# Altium PCB PCB1.PcbDoc
Units mm, origin at the board's own origin, x right, y up, seen from the top; angles counter-clockwise.
Board outline 32 x 41 mm, 2 copper layers (Top Layer, Bottom Layer); 2 components, 20 nets, 46 pads, 0 vias.
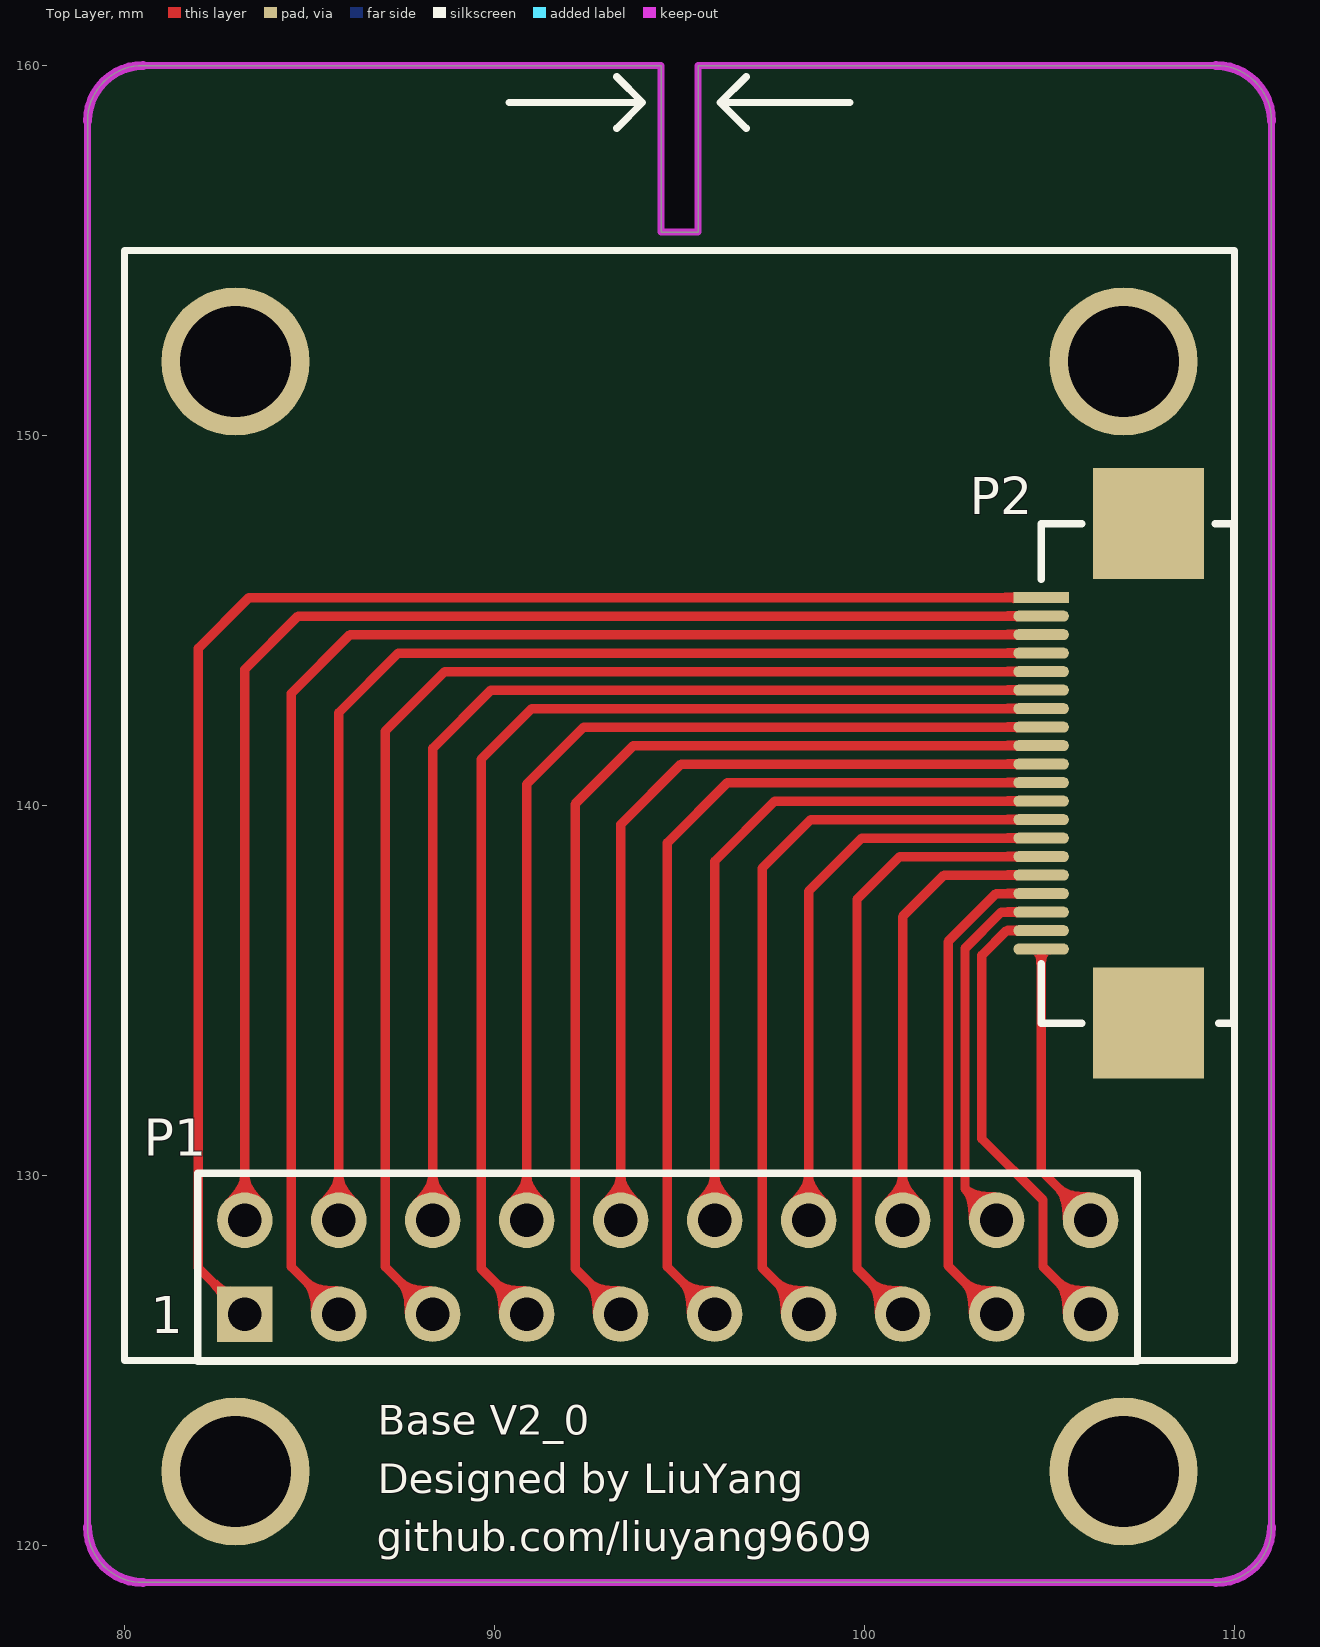
[diagram p0: Top Layer view]
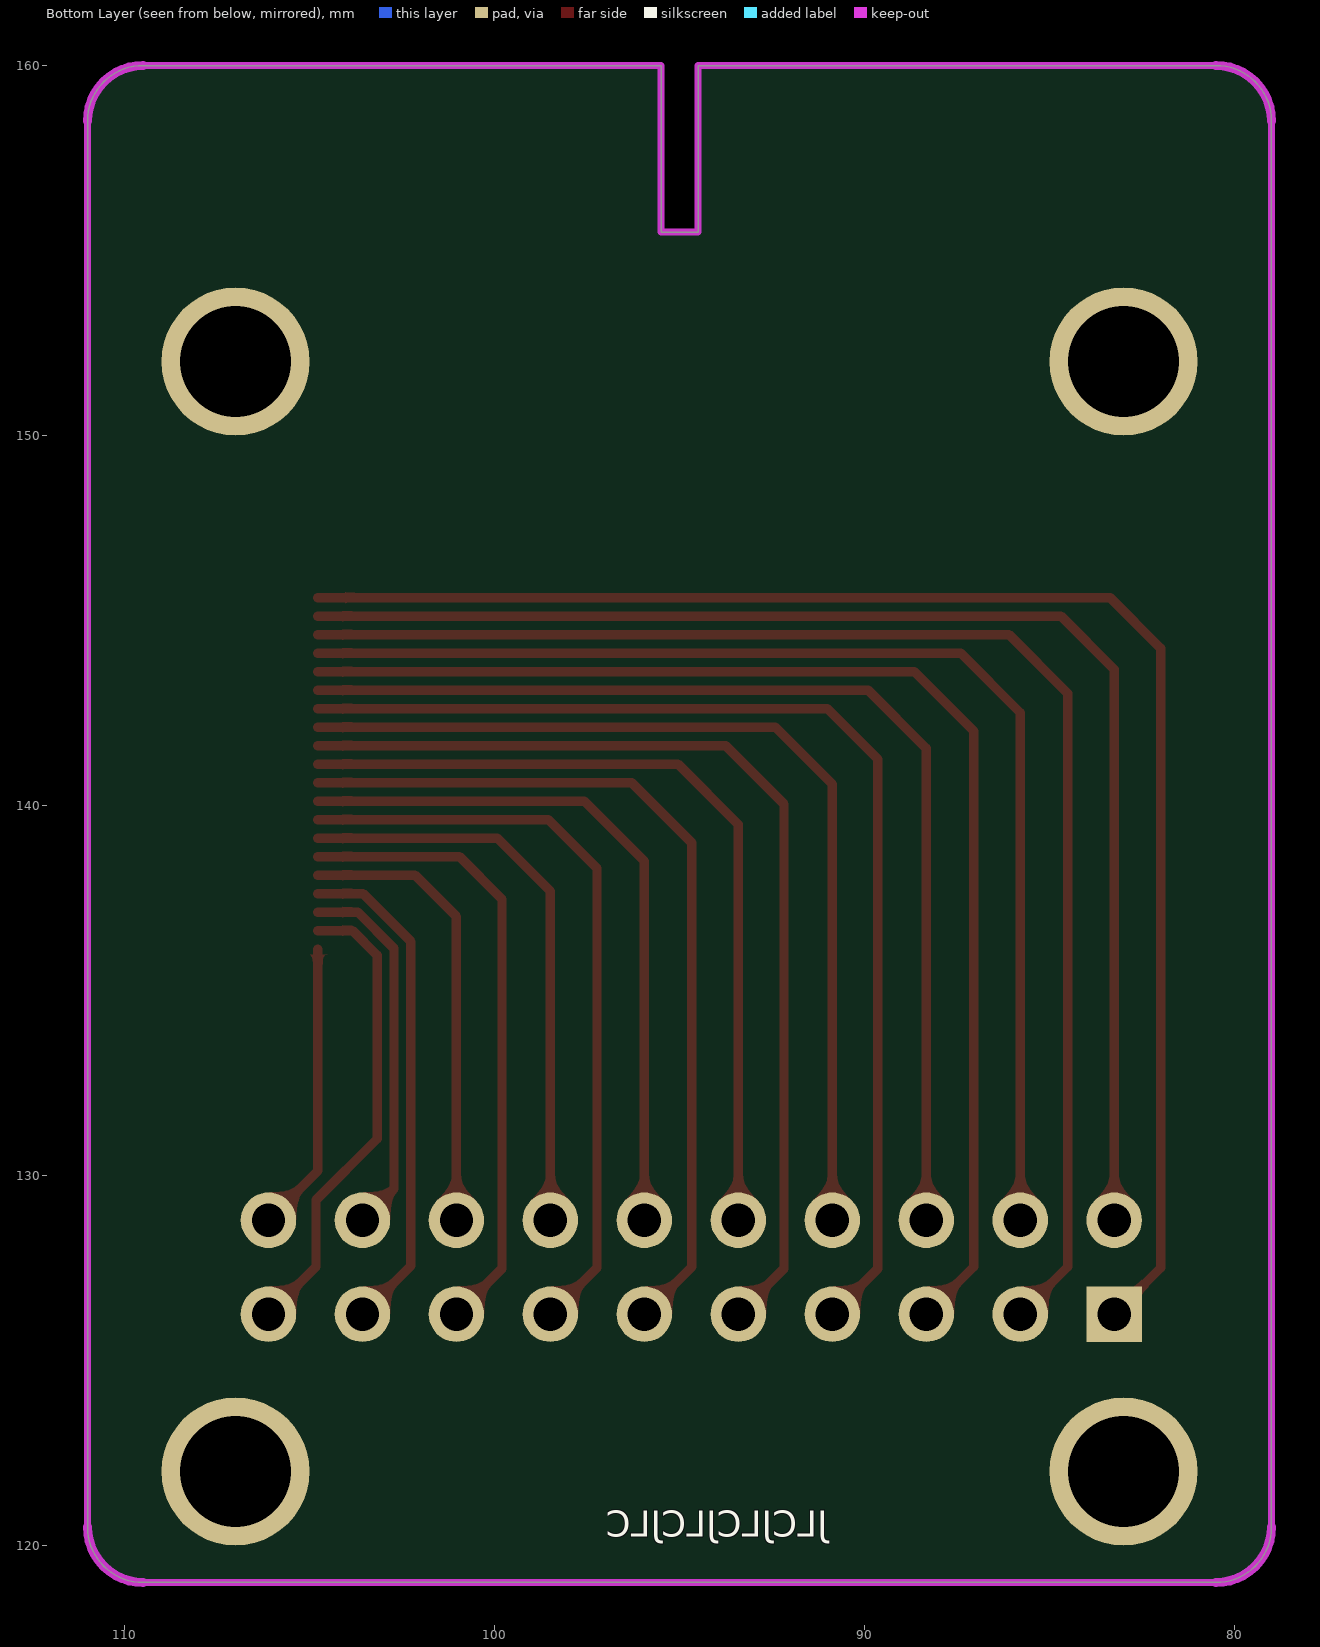
[diagram p1: Bottom Layer view, seen from below]

## Layer stack, top to bottom
Top Solder: solder mask 0.0102, Solder Resist, Dk 3.5
Top Layer: signal copper 0.0356
Dielectric 1: dielectric 0.32, FR-4, Dk 4.8
Bottom Layer: signal copper 0.0356
Bottom Solder: solder mask 0.0102, Solder Resist, Dk 3.5

## Board outline
79,120.5 79,158.5 cw(c80.5,158.5) 80.5,160 94.5,160 94.5,155.5 95.5,155.5 95.5,160 109.5,160 cw(c109.5,158.5) 111,158.5 111,120.5 cw(c109.5,120.5) 109.5,119 80.5,119 cw(c80.5,120.5)

## Design rules (kind name [scope] priority, off if disabled: settings)
Clearance [All] p1: gap=0.2
PolygonConnect [All] p1: connectstyle=Relief reliefconductorwidth=0.254 reliefentries=4 polygonreliefangle="90 Angle" airgapwidth=0.254
RoutingVias [All] p1: holewidth=0.3 width=0.6 viastyle="Through Hole" minholewidth=0.3 minwidth=0.6 maxholewidth=3 maxwidth=6
SolderMaskExpansion [All] p1: expansion=0.102
Width [All] p1: maxlimit=0.508 minlimit=0.2 preferedwidth=0.254
30 further rules are at their usual default settings.

## Classes and differential pairs
component class Sheet1: P1

## Components (designator, comment, footprint, x,y, rotation, side; value= is the part's Value field where it differs from the comment)
P1 "Header 10X2" HDR2X10 83.25,126.25 r0 top
P2 "Header 22" FPC20Pin 104.775,145.618 r0 top (schematic designator P3)

## Footprints (in the part's own frame and the unit in brackets; to place one, negate y for a bottom-side part, rotate by r counter-clockwise, add the part's x,y. Pads: shape width x height; smd on the part's side, far side on the other; paste and mask are expansions set on the pad)
FPC20Pin [mm]
  rect 1.5x0.3 smd: 1(0,0)
  oval 1.5x0.3 smd: 2(0,-0.5) 3(0,-1) 4(0,-1.5) 5(0,-2) 6(0,-2.5) 7(0,-3) 8(0,-3.5) 9(0,-4) 10(0,-4.5) 11(0,-5) 12(0,-5.5) 13(0,-6) 14(0,-6.5) 15(0,-7) 16(0,-7.5) 17(0,-8) 18(0,-8.5) 19(0,-9) 20(0,-9.5)
  rect 3x3 smd: 21(2.9,2) 22(2.9,-11.5)
  silkscreen extent 0,-11.5 5.2,2
HDR2X10 [mm] "Connector; Header; 10x2 Position"
  rect 1.5x1.5 hole 0.9: 1(0,0)
  round 1.5 hole 0.9: 2(0,2.54) 3(2.54,0) 4(2.54,2.54) 5(5.08,0) 6(5.08,2.54) 7(7.62,0) 8(7.62,2.54) 9(10.16,0) 10(10.16,2.54) 11(12.7,0) 12(12.7,2.54) 13(15.24,0) 14(15.24,2.54) 15(17.78,0) 16(17.78,2.54) 17(20.32,0) 18(20.32,2.54) 19(22.86,0) 20(22.86,2.54)
  silkscreen extent -1.27,-1.27 24.13,3.81

## Part data
P1: "Header, 10-Pin, Dual row"
P2: "Header, 22-Pin"

## Free pads (board coordinates)
  round 4 hole 3: 0(83,152) 1(107,152) 2(107,122) 3(83,122)

## Nets (pads, with @x,y where several pads share a name; then routed paths per layer and width w, separated by ;. In a path a pad name is that pad's centre, name@x,y a point inside that pad or via, vN(x,y) a via of type N, cw(c..) or ccw(c..) an arc to the next point about the centre after c; other vN are vias at no path point)
D1: P1.3 P2.3 | length 38.2
  Top Layer w0.254: P1.3 84.506,127.534 84.506,143.027 86.097,144.618 P2.3
D2: P1.4 P2.4 | length 33.4
  Top Layer w0.254: P1.4 85.79,142.508 87.4,144.118 P2.4
D3: P1.5 P2.5 | length 34.7
  Top Layer w0.254: P1.5 87.046,127.534 87.046,142.011 88.653,143.618 P2.5
D4: P1.6 P2.6 | length 29.9
  Top Layer w0.254: P1.6 88.33,141.543 89.905,143.118 P2.6
D5: P1.7 P2.7 | length 31.2
  Top Layer w0.254: P1.7 89.637,127.483 89.637,141.249 91.005,142.618 P2.7
D6: P1.8 P2.8 | length 26.3
  Top Layer w0.254: P1.8 90.87,140.578 92.41,142.118 P2.8
D7: P1.9 P2.9 | length 27.6
  Top Layer w0.254: P1.9 92.177,127.483 92.177,140.039 93.756,141.618 P2.9
D8: P1.10 P2.10 | length 22.7
  Top Layer w0.254: P1.10 93.41,139.486 95.043,141.118 P2.10
D9: P1.11 P2.11 | length 24.1
  Top Layer w0.254: P1.11 94.666,127.534 94.666,138.989 96.295,140.618 P2.11
D10: P1.12 P2.12 | length 19.2
  Top Layer w0.254: P1.12 95.95,138.495 97.573,140.118 P2.12
D11: P1.13 P2.13 | length 20.7
  Top Layer w0.254: P1.13 97.231,127.509 97.231,138.303 98.546,139.618 P2.13
D12: P1.14 P2.14 | length 15.8
  Top Layer w0.254: P1.14 98.49,137.682 99.926,139.118 P2.14
D13: P1.15 P2.15 | length 17.2
  Top Layer w0.254: P1.15 99.797,127.483 99.797,137.465 100.95,138.618 P2.15
D14: P1.16 P2.16 | length 12.4
  Top Layer w0.254: P1.16 101.03,136.996 102.152,138.118 P2.16
D15: P1.17 P2.17 | length 13.7
  Top Layer w0.254: P1.17 102.26,127.56 102.26,136.322 103.557,137.618 P2.17
D16: P1.18 P2.18 | length 10.2
  Top Layer w0.254: P1.18 102.718,129.642 102.718,136.137 103.699,137.118 P2.18
D17: P1.19 P2.19 | length 12.8
  Top Layer w0.254: P2.19 103.841,136.618 103.172,135.949 103.172,130.991 104.826,129.337 104.826,127.534 P1.19
D18: P1.20 P2.20 | length 7.9
  Top Layer w0.254: P2.20 104.775,130.125 P1.20
GND: P1.2 P2.2 | length 37
  Top Layer w0.254: P1.2 83.25,143.677 84.692,145.118 P2.2
VCC: P1.1 P2.1 | length 41.9
  Top Layer w0.254: P1.1 81.991,127.509 81.991,144.247 83.363,145.618 P2.1
pads on no net: P2.21 P2.22

## Keep-outs
Keep-Out Layer:
  lines w0.2: 79,120.5 79,124 79,156 79,158.5 ; 80.5,119 109.5,119 ; 80.5,160 87,160 94.5,160 94.5,155.5 95.5,155.5 95.5,160 103,160 109.5,160 ; 111,120.5 111,124 111,156 111,158.5
  lines w0.254: 79,120.5 ccw(c80.5,120.5) 80.5,119 ; 79,158.5 cw(c80.5,158.5) 80.5,160 ; 109.5,119 ccw(c109.5,120.5) 111,120.5 ; 109.5,160 cw(c109.5,158.5) 111,158.5

## Silkscreen, mask and mechanical layers (free items; w line width, h text height)
Top Overlay:
  lines w0.2: 90.4,159 94,159 ; 93.3,158.3 94,159 ; 93.3,159.7 94,159 ; 96.8,158.3 96.1,159 ; 96.8,159.7 96.1,159 ; 99.6,159 96.1,159 ; 94,159 94,159 ; 96.1,159 96.1,159 ; 96.1,159 96.1,159 ; 80,125 80,155 110,155 110,125 80,125
  text "Base V2_0" at 86.843,122.987 h0.8
  text "Designed by LiuYang" at 86.843,121.412 h0.8
  text "github.com/liuyang9609" at 86.817,119.837 h0.8
Bottom Overlay:
  text "JLCJLCJLCJLC" at 91,120 h1.2

## Text inside footprints (layer, text, board x,y; h text height)
P1: Top Overlay "1" at 80.71,125.742 h1